# EAGLE board Motor con cambio de giro (DC) (EAGLE 9.7.0)

Size 95.82 x 63.22 mm. Coordinates in mm from the lower left corner, seen from the top.
Outline: 0,0 95.82,0 95.82,63.22 0,63.22 0,0
Copper layers (1*16): Top 0.035mm / dielectric 1.5mm / Bottom 0.035mm
Design rules "default": minimum track width 6mil, minimum drill 0.35mm, track to track 6mil, track to pad 6mil, pad to pad 6mil, via to via 6mil, smd to smd 6mil, copper to edge 40mil, drill to drill 6mil, minimum pad ring 10mil, minimum via ring 8mil, stop-mask expansion 4mil, vias tented up to drill 0mil, thermal gap 10mil

## Footprints (pad centres in the part's own frame; a part is rotated, then mirrored left to right if it is on the bottom)
BATTERY-GENERIC = drill 1.118 pad 3.15 octagon: + 2.54,0; - -2.54,0
DIODE-AXIAL = drill 1: 1 -5.08,0; 2 5.08,0
MOTOR = drill 1.118 pad 3.15 octagon: + 2.54,0; - -2.54,0
RESAD1016W63L850D250B = drill 0.83 pad 1.43: 1 -5.08,0; 2 5.08,0
SWITCH-SPDT-PTH-8.5X3.7MM = drill 1.016 pad 1.88: 1 -2.54,0; 2 0,0; 3 2.54,0
TO92 = drill 0.813 octagon: 1 -1.27,0; 2 0,1.905; 3 1.27,0

## Placement (x,y rotation side)
BAT1  4.5V  [BATTERY-GENERIC]  8.26,43.16 270 top
D1  DIODEDIODE-AXIAL  [DIODE-AXIAL]  58.91,34.41 90 top
D2  DIODEDIODE-AXIAL  [DIODE-AXIAL]  66.53,9.01 90 top
D3  DIODEDIODE-AXIAL  [DIODE-AXIAL]  58.91,9.01 90 top
D4  DIODEDIODE-AXIAL  [DIODE-AXIAL]  66.53,34.41 90 top
M1  MOTOR_HDR  [MOTOR]  62.88,54.96 0 top
R1  1k  [RESAD1016W63L850D250B]  86.85,29.33 0 top
R2  1k  [RESAD1016W63L850D250B]  38.59,9.01 0 top
R3  1k  [RESAD1016W63L850D250B]  86.85,9.01 0 top
R4  1k  [RESAD1016W63L850D250B]  38.59,29.33 0 top
S1  TOGGLE  [SWITCH-SPDT-PTH-8.5X3.7MM]  25.89,24.25 0 top
T1  NPN  [TO92]  74.15,29.33 0 top
T2  NPN  [TO92]  51.29,29.33 0 top
T3  NPN  [TO92]  51.29,9.01 0 top
T4  NPN  [TO92]  74.15,9.01 0 top

## Library data of the parts
BAT1 D1-D4 M1 R1-R4 S1 = Tinkercad
T1-T4 = Tinkercad; CATEGORY: Transistor; SUB-CATEGORY: BJT; TYPE: NPN

## Nets
BAT1+: BAT1.+ D1.2 D4.2 S1.2 T1.1 T2.1
BAT1-: BAT1.- D2.1 D3.1 T3.3 T4.3
M1_+: D2.2 D4.1 M1.+ T1.3 T4.1
M1_-: D1.1 D3.2 M1.- T2.3 T3.1
S1_O: R1.2 R2.1 S1.1
S1_S: R3.2 R4.1 S1.3
T1_B: R1.1 T1.2
T2_B: R4.2 T2.2
T3_B: R2.2 T3.2
T4_B: R3.1 T4.2

## Tracks (layer width: path | path; a pad name or v marks a point on that pad's centre or on a via)
BAT1+  (5 unrouted)
BAT1-  (4 unrouted)
M1_+  (4 unrouted)
M1_-  (4 unrouted)
S1_O  (2 unrouted)
S1_S  (2 unrouted)
T1_B  (1 unrouted)
T2_B  (1 unrouted)
T3_B  (1 unrouted)
T4_B  (1 unrouted)